# Altium PCB RocketFPGA.PcbDoc
Units mil, origin at the board's own origin, x right, y up, seen from the top; angles counter-clockwise.
Board outline 1000 x 1875 mil, 2 copper layers (Top Layer, Bottom Layer), stack 65.792 mil thick; 57 components, 73 nets, 273 pads, 110 vias.
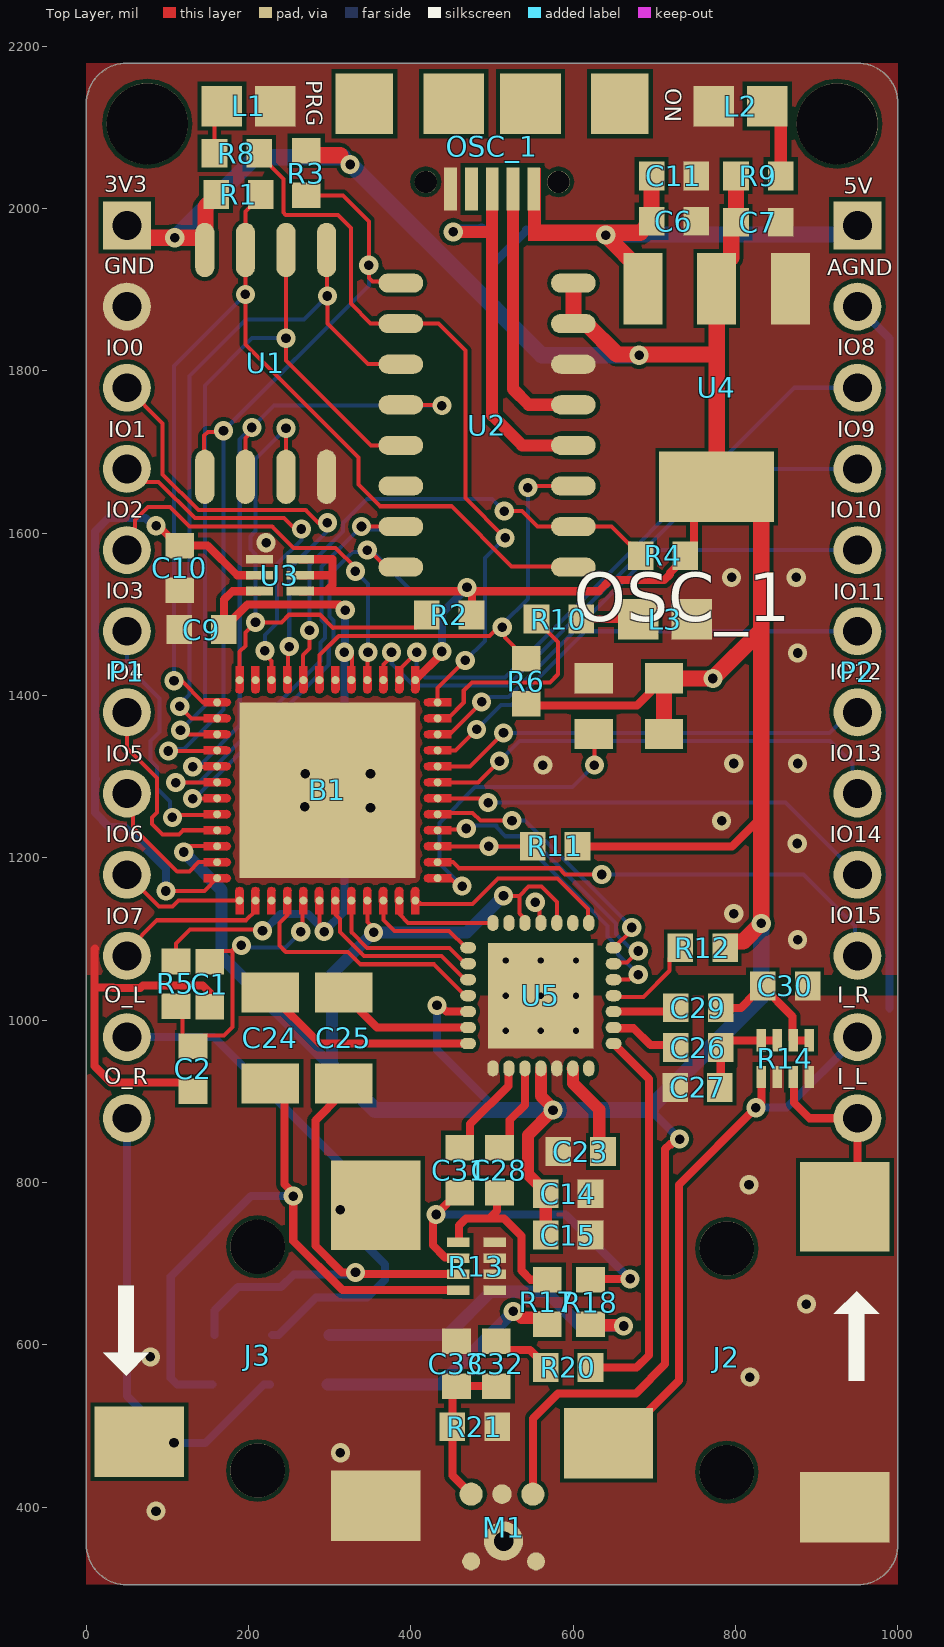
[diagram p0: Top Layer view]
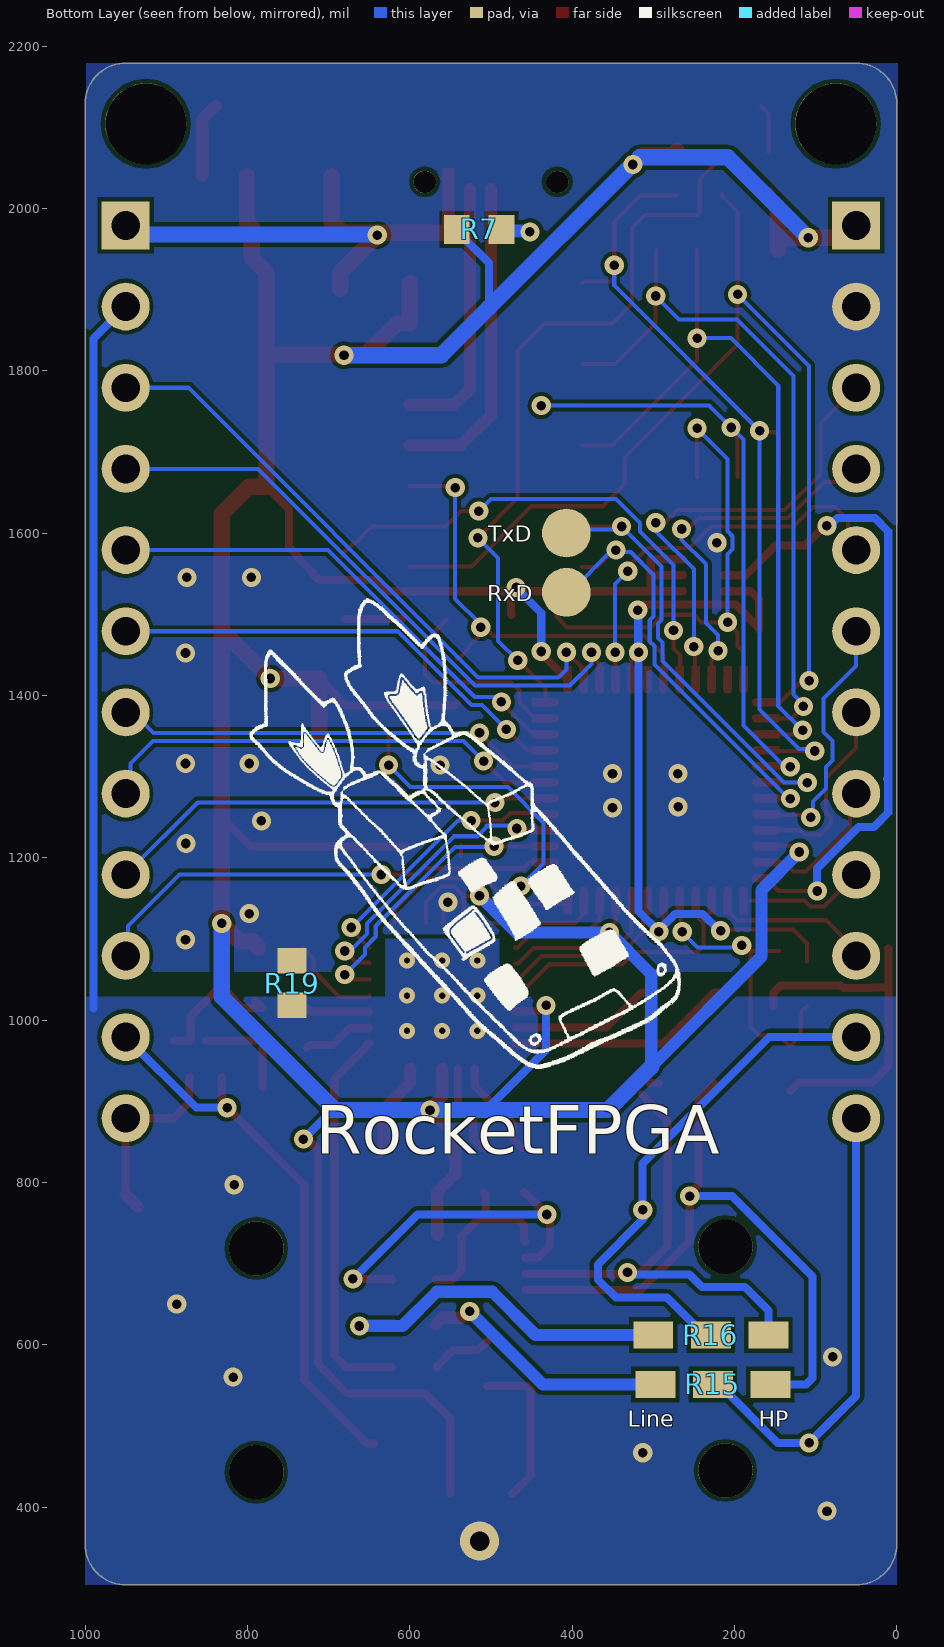
[diagram p1: Bottom Layer view, seen from below]
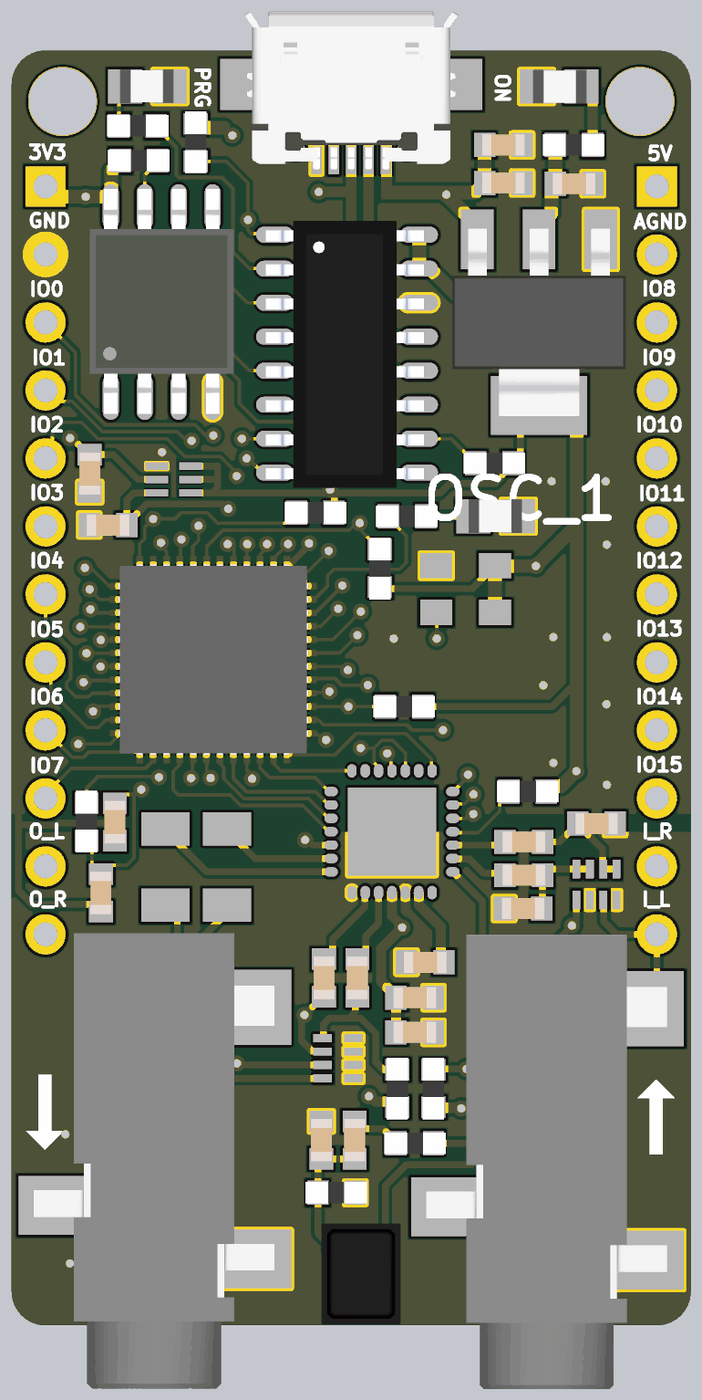
[diagram p2: 3D render of the assembled board from above, using the file's embedded part models]

## Layer stack, top to bottom
Top Solder: solder mask 0.4, Solder Resist, Dk 3.5
Top Layer: signal copper 1.4
Dielectric 1: dielectric 62.9921, FR-4, Dk 4.8
Bottom Layer: signal copper 1.4
Bottom Solder: solder mask 0.4, Solder Resist, Dk 3.5

## Board outline
50,304 cw(c50,354) 0,354 0,2129 cw(c50,2129) 50,2179 950,2179 cw(c950,2129) 1000,2129 1000,354 cw(c950,354) 950,304

## Design rules (kind name [scope] priority, off if disabled: settings)
Clearance [All] p1: gap=5 ignorepadtopadclearanceinfootprint=FALSE except(0: Arc-Hole Track-Hole SMDPad-Hole THPad-Hole Via-Hole Fill-Hole Poly-Hole Region-Hole Text-Hole; 3: SMDPad-SMDPad)
DiffPairsRouting [All] p1: maxlimit=10 minlimit=10 mostfreqgap=10 toplayer_minwidth=15 toplayer_maxwidth=15 toplayer_prefwidth=15 bottomlayer_minwidth=15 bottomlayer_maxwidth=15 bottomlayer_prefwidth=15 maxuncoupledlength=500
MinimumSolderMaskSliver [All] p1: minsoldermaskwidth=0
PolygonConnect [All] p1: connectstyle=Direct reliefconductorwidth=10 reliefentries=4 polygonreliefangle="90 Angle" airgapwidth=10
RoutingVias [All] p1: holewidth=11.81 width=23.62 viastyle="Through Hole" minholewidth=11.81 minwidth=23.62 maxholewidth=50 maxwidth=50
SilkToSolderMaskClearance [IsPad] p1: minsilkscreentomaskgap=0 clearancetoexposedcopper=TRUE
SolderMaskExpansion [All] p1: expansion=4
Width [All] p1: maxlimit=40 minlimit=5 preferedwidth=10 minimp=50.000000 maximp=50.000000 favimp=50.000000
27 further rules are at their usual default settings.

## Classes and differential pairs
component class 04_AudioCodec: C14 C15 C23 C24 C25 C26 C27 C28 C29 C30 C31 C32 C33 J2 J3 M1 R11 R12 R13 R14 R15 R16 R17 R18 R19 R20 R21 U5
component class 02_USB_MCU: C6 C7 OSC_1 R6 R7 U2
component class 01_FPGA_FlashMem: B1 C1 C2 OSC_1 R1 R2 R3 R4 R5 U1
component class 03_Power_IO: C9 C10 C11 L1 L2 L3 P1 P2 R8 R9 R10 U3 U4
differential pair USB_D: +USB_D_P -USB_D_N

## Components (designator, comment, footprint, x,y, rotation, side; value= is the part's Value field where it differs from the comment)
B1 "ICE40UP5K-SG48ITR" QFN50P700X700X100-49N-D 297,1283 r270 top locked
C1 "Ceramic capacitor" "0603 CAP" 152,1044 r90 top value=100nF
C2 "Ceramic capacitor" "0603 CAP" 131.51,940 r90 top value=1uF
C6 "Ceramic capacitor" "0603 CAP" 724,1984 r0 top value=100nF
C7 "Ceramic capacitor" "0603 CAP" 828,1983 r0 top value=100nF
C9 "Ceramic capacitor" "0603 CAP" 142,1481 r180 top value=1uF
C10 "Ceramic capacitor" "0603 CAP" 115,1557 r270 top value=100nF
C11 "Ceramic capacitor" "0603 CAP" 724,2040 r0 top value=1uF
C14 "Ceramic capacitor" "0603 CAP" 593.59,786 r0 top value=100nF
C15 "Ceramic capacitor" "0603 CAP" 593.59,735 r0 top value=1uF
C23 "Ceramic capacitor" "0603 CAP" 609,838 r180 top value=1uF
C24 "Capacitor Electrolitic" CAPCP3216X16N 226.54,978 r270 top
C25 "Capacitor Electrolitic" CAPCP3216X16N 317,978 r270 top
C26 "Ceramic capacitor" "0603 CAP" 754,966 r180 top value=1uF
C27 "Ceramic capacitor" "0603 CAP" 753,917 r180 top value=220pF
C28 "Ceramic capacitor" "0603 CAP" 509,815 r270 top value=1uF
C29 "Ceramic capacitor" "0603 CAP" 754,1015 r0 top value=1uF
C30 "Ceramic capacitor" "0603 CAP" 861,1042 r0 top value=220pF
C31 "Ceramic capacitor" "0603 CAP" 460,815 r270 top value=1uF
C32 "Ceramic capacitor" "0603 CAP" 505,576.44 r270 top value=1uF
C33 "Ceramic capacitor" "0603 CAP" 456,576.44 r90 top value=1uF
J2 "SJ-3523-SMT-TR" CUI_SJ-3523-SMT-TR 789,443 r90 top locked
J3 "SJ-3523-SMT-TR" CUI_SJ-3523-SMT-TR 211,445 r90 top locked
L1 "LED_SMD" 0805 196,2126 r0 top locked
L2 "LED_SMD" 0805 810,2126 r180 top locked
L3 "LED_SMD" 0805 709,1494 r0 top
M1 "SPU0410LR5H-1" SPU0410LR5H-1 474.04,415.83 r0 top
OSC_1 "Canned Oscilator" "canned oscillator small" 711.77,1421.29 r180 top
OSC_1 "Micro USB 2.0 Type B" 629105136821 500,2129 r180 top locked
P1 "Header 12 x 1" HDR1X12 50,1979 r270 top
P2 "Header 12 x 1" HDR1X12 950,1979 r270 top
R1 "Resistor" "RESISTENCIA 0603" 187,2017 r180 top value=10k
R2 "Resistor" "RESISTENCIA 0603" 447.5,1499 r0 top value=10k
R3 "Resistor" "RESISTENCIA 0603" 271,2044 r90 top value=10k
R4 "Resistor" "RESISTENCIA 0603" 711,1572 r0 top value=10k
R5 "Resistor" "RESISTENCIA 0603" 110.39,1045 r90 top value=120
R6 "Resistor" "RESISTENCIA 0603" 542,1416.94 r270 top value=10k
R7 "Resistor" "RESISTENCIA 0603" 514,1974 r180 bottom value=10k
R8 "Resistor" "RESISTENCIA 0603" 186,2068 r0 top value=120
R9 "Resistor" "RESISTENCIA 0603" 827.5,2040 r180 top value=120
R10 "Resistor" "RESISTENCIA 0603" 581.69,1494 r180 top value=120
R11 "Resistor" "RESISTENCIA 0603" 578.06,1214 r0 top value=10k
R12 "Resistor" "RESISTENCIA 0603" 760,1089.06 r0 top value=10k
R13 "Resistor array" RESISTORARRAY_0804 458.03,726.37 r270 top value=47k
R14 "Resistor array" RESISTORARRAY_0804 831.63,929.72 r0 top value=5k6
R15 "Selection resistor" SelectionResistor 191,551 r0 bottom
R16 "Selection resistor" SelectionResistor 193.57,612 r0 bottom
R17 "Resistor" "RESISTENCIA 0603" 568,652 r270 top value=120
R18 "Resistor" "RESISTENCIA 0603" 621,652 r270 top value=120
R19 "Resistor" "Resistencia 0603" 745,1045 r270 bottom value=0R
R20 "Resistor" "RESISTENCIA 0603" 594.09,572 r0 top value=10k
R21 "Resistor" "RESISTENCIA 0603" 478,499 r180 top value=47k
U1 "W25Q32JV" W25Q32J 220,1808 r90 top
U2 "CH551G" CH551 493.77,1733 r0 top
U3 "1V2 and 2V5 dual regulator" "DSE 6" 263.54,1528.32 r180 top
U4 "KIA1117-3.3" SOT-223 776.56,1779 r180 top
U5 "WM8731" WM8731 560,1030 r270 top locked

## Footprints (in the part's own frame and the unit in brackets; to place one, negate y for a bottom-side part, rotate by r counter-clockwise, add the part's x,y. Pads: shape width x height; smd on the part's side, far side on the other; paste and mask are expansions set on the pad)
"0603 CAP" [mm] "Chip Capacitor, Body 1.6x0.8mm, IPC High Density"
  rect 0.8x0.9 smd: 1(-0.7,0) 2(0.7,0)
  body extent -0.8,-0.4 0.8,0.4, height 0.78
0805 [mil]
  rect 50x50 smd: 1(-29,0) 2(37,0)
  body extent -36,-25 42,25, height 17
629105136821 [mm] "Micro USB 2.0 SMT Type B Horizontal 5 Contacts"
  rect 0.4x1.35 smd: 1(-1.3,2.675) 2(-0.65,2.675) 3(0,2.675) 4(0.65,2.675) 5(1.3,2.675)
  round 0.7 hole 0.7 unplated: M1(-2.075,2.45) M2(2.075,2.45)
  rect 1.8x1.9 smd: S1(-4,0) S4(4,0)
  rect 1.9x1.9 smd: S2(-1.2,0) S3(1.2,0)
  body extent -4,-2.73 4,3.17, height 2.77
"canned oscillator small" [mm] "SG-8018CG 49.1520M-TJHSA3"
  rect 1.2x0.95 smd: 1(0,0) 2(2.2,0) 3(2.2,1.75) 4(0,1.75)
CAPCP3216X16N [mm] "Chip Capacitor, 2-Leads, Body 3.20x1.60mm, IPC Medium Density"
  rect 1.25x1.8 smd: 1(-1.425,0) 2(1.425,0)
  body extent -1.7,-0.9 1.7,0.9, height 1.6
CH551 [mm] "MCU"
  oval 1.4x0.6 smd: 1(-2.7,4.445) 2(-2.7,3.175) 3(-2.7,1.905) 4(-2.7,0.635) 5(-2.7,-0.635) 6(-2.7,-1.905) 7(-2.7,-3.175) 8(-2.7,-4.445) 9(2.7,-4.445) 10(2.7,-3.175) 11(2.7,-1.905) 12(2.7,-0.635) 13(2.7,0.635) 14(2.7,1.905) 15(2.7,3.175) 16(2.7,4.445)
  body extent -6.76,-5.02 2.87,7.52, height 1.45
CUI_SJ-3523-SMT-TR [mm] "mini jack"
  rect 2.2x2.8 smd: 1(-1.1,-3.7) 3(0.9,3.7)
  rect 2.8x2.8 smd: 2(8.3,-3.7)
  round 1.7 hole 1.7 unplated: None(0,0) None(7,0)
  body extent -5.93,-4.47 11.07,4.53, height 5
"DSE 6" [mm] "DSE PACKAGE"
  rect 0.85x0.28 smd mask+0.05: 1(0,0) 2(0,-0.5) 3(0,-1) 4(1.27,-1) 5(1.27,-0.5) 6(1.27,0)
  body extent -0.53,-1.24 1.85,0.25, height 0.8
HDR1X12 [mm] "Connector; Header; 12 Position"
  rect 1.5x1.5 hole 0.9: 1(0,0)
  round 1.5 hole 0.9: 2(2.54,0) 3(5.08,0) 4(7.62,0) 5(10.16,0) 6(12.7,0) 7(15.24,0) 8(17.78,0) 9(20.32,0) 10(22.86,0) 11(25.4,0) 12(27.94,0)
QFN50P700X700X100-49N-D [mm]
  round 0.25 smd: 1(-3.45,2.75) 2(-3.45,2.25) 3(-3.45,1.75) 4(-3.45,1.25) 5(-3.45,0.75) 6(-3.45,0.25) 7(-3.45,-0.25) 8(-3.45,-0.75) 9(-3.45,-1.25) 10(-3.45,-1.75) 11(-3.45,-2.25) 12(-3.45,-2.75) 13(-2.75,-3.45) 14(-2.25,-3.45) 15(-1.75,-3.45) 16(-1.25,-3.45) 17(-0.75,-3.45) 18(-0.25,-3.45) 19(0.25,-3.45) 20(0.75,-3.45) 21(1.25,-3.45) 22(1.75,-3.45) 23(2.25,-3.45) 24(2.75,-3.45) 25(3.45,-2.75) 26(3.45,-2.25) 27(3.45,-1.75) 28(3.45,-1.25) 29(3.45,-0.75) 30(3.45,-0.25) 31(3.45,0.25) 32(3.45,0.75) 33(3.45,1.25) 34(3.45,1.75) 35(3.45,2.25) 36(3.45,2.75) 37(2.75,3.45) 38(2.25,3.45) 39(1.75,3.45) 40(1.25,3.45) 41(0.75,3.45) 42(0.25,3.45) 43(-0.25,3.45) 44(-0.75,3.45) 45(-1.25,3.45) 46(-1.75,3.45) 47(-2.25,3.45) 48(-2.75,3.45)
  rrect0% 5.5x5.5 smd: 49(0,0)
  Top Layer region: 3.875,-0.383 3.15,-0.393 3.054,-0.354 3.015,-0.258 3.054,-0.162 3.152,-0.122 3.875,-0.132
  Top Layer region: -2.625,3.875 -2.615,3.15 -2.654,3.054 -2.75,3.015 -2.846,3.054 -2.885,3.15 -2.875,3.15 -2.875,3.875 -2.625,3.875
  Top Layer region: -2.125,3.875 -2.115,3.15 -2.154,3.054 -2.25,3.015 -2.346,3.054 -2.385,3.15 -2.375,3.15 -2.375,3.875 -2.125,3.875
  Top Layer region: -1.625,3.875 -1.615,3.15 -1.654,3.054 -1.75,3.015 -1.846,3.054 -1.885,3.15 -1.875,3.15 -1.875,3.875 -1.625,3.875
  Top Layer region: -1.125,3.875 -1.115,3.15 -1.154,3.054 -1.25,3.015 -1.346,3.054 -1.385,3.15 -1.375,3.15 -1.375,3.875 -1.125,3.875
  Top Layer region: -0.625,3.875 -0.615,3.15 -0.654,3.054 -0.75,3.015 -0.846,3.054 -0.885,3.15 -0.875,3.15 -0.875,3.875 -0.625,3.875
  Top Layer region: -0.125,3.875 -0.115,3.15 -0.154,3.054 -0.25,3.015 -0.346,3.054 -0.385,3.15 -0.375,3.15 -0.375,3.875 -0.125,3.875
  Top Layer region: 0.375,3.875 0.385,3.15 0.346,3.054 0.25,3.015 0.154,3.054 0.115,3.15 0.125,3.15 0.125,3.875 0.375,3.875
  Top Layer region: 0.875,3.875 0.885,3.15 0.846,3.054 0.75,3.015 0.654,3.054 0.615,3.15 0.625,3.15 0.625,3.875 0.875,3.875
  Top Layer region: 1.375,3.875 1.385,3.15 1.346,3.054 1.25,3.015 1.154,3.054 1.115,3.15 1.125,3.15 1.125,3.875 1.375,3.875
  Top Layer region: 1.875,3.875 1.885,3.15 1.846,3.054 1.75,3.015 1.654,3.054 1.615,3.15 1.625,3.15 1.625,3.875 1.875,3.875
  Top Layer region: 2.375,3.875 2.385,3.15 2.346,3.054 2.25,3.015 2.154,3.054 2.115,3.15 2.125,3.15 2.125,3.875 2.375,3.875
  Top Layer region: 2.875,3.875 2.885,3.15 2.846,3.054 2.75,3.015 2.654,3.054 2.615,3.15 2.625,3.15 2.625,3.875 2.875,3.875
  Top Layer region: 3.875,2.625 3.15,2.615 3.054,2.654 3.015,2.75 3.054,2.846 3.15,2.885 3.15,2.875 3.875,2.875 3.875,2.625
  Top Layer region: 3.875,2.125 3.15,2.115 3.054,2.154 3.015,2.25 3.054,2.346 3.15,2.385 3.15,2.375 3.875,2.375 3.875,2.125
  Top Layer region: 3.875,1.625 3.15,1.615 3.054,1.654 3.015,1.75 3.054,1.846 3.15,1.885 3.15,1.875 3.875,1.875 3.875,1.625
  Top Layer region: 3.875,1.125 3.15,1.115 3.054,1.154 3.015,1.25 3.054,1.346 3.15,1.385 3.15,1.375 3.875,1.375 3.875,1.125
  Top Layer region: 3.875,0.625 3.15,0.615 3.054,0.654 3.015,0.75 3.054,0.846 3.15,0.885 3.15,0.875 3.875,0.875 3.875,0.625
  Top Layer region: 3.875,0.125 3.15,0.115 3.054,0.154 3.015,0.25 3.054,0.346 3.15,0.385 3.15,0.375 3.875,0.375 3.875,0.125
  Top Layer region: 3.875,-0.875 3.15,-0.885 3.054,-0.846 3.015,-0.75 3.054,-0.654 3.15,-0.615 3.15,-0.625 3.875,-0.625 3.875,-0.875
  Top Layer region: 3.875,-1.375 3.15,-1.385 3.054,-1.346 3.015,-1.25 3.054,-1.154 3.15,-1.115 3.15,-1.125 3.875,-1.125 3.875,-1.375
  Top Layer region: 3.875,-1.875 3.15,-1.885 3.054,-1.846 3.015,-1.75 3.054,-1.654 3.15,-1.615 3.15,-1.625 3.875,-1.625 3.875,-1.875
  Top Layer region: 3.875,-2.375 3.15,-2.385 3.054,-2.346 3.015,-2.25 3.054,-2.154 3.15,-2.115 3.15,-2.125 3.875,-2.125 3.875,-2.375
  Top Layer region: 3.875,-2.875 3.15,-2.885 3.054,-2.846 3.015,-2.75 3.054,-2.654 3.15,-2.615 3.15,-2.625 3.875,-2.625 3.875,-2.875
  Top Layer region: 2.625,-3.875 2.615,-3.15 2.654,-3.054 2.75,-3.015 2.846,-3.054 2.885,-3.15 2.875,-3.15 2.875,-3.875 2.625,-3.875
  Top Layer region: 2.125,-3.875 2.115,-3.15 2.154,-3.054 2.25,-3.015 2.346,-3.054 2.385,-3.15 2.375,-3.15 2.375,-3.875 2.125,-3.875
  Top Layer region: 1.625,-3.875 1.615,-3.15 1.654,-3.054 1.75,-3.015 1.846,-3.054 1.885,-3.15 1.875,-3.15 1.875,-3.875 1.625,-3.875
  Top Layer region: 1.125,-3.875 1.115,-3.15 1.154,-3.054 1.25,-3.015 1.346,-3.054 1.385,-3.15 1.375,-3.15 1.375,-3.875 1.125,-3.875
  Top Layer region: 0.625,-3.875 0.615,-3.15 0.654,-3.054 0.75,-3.015 0.846,-3.054 0.885,-3.15 0.875,-3.15 0.875,-3.875 0.625,-3.875
  Top Layer region: 0.125,-3.875 0.115,-3.15 0.154,-3.054 0.25,-3.015 0.346,-3.054 0.385,-3.15 0.375,-3.15 0.375,-3.875 0.125,-3.875
  Top Layer region: -0.375,-3.875 -0.385,-3.15 -0.346,-3.054 -0.25,-3.015 -0.154,-3.054 -0.115,-3.15 -0.125,-3.15 -0.125,-3.875 -0.375,-3.875
  Top Layer region: -0.875,-3.875 -0.885,-3.15 -0.846,-3.054 -0.75,-3.015 -0.654,-3.054 -0.615,-3.15 -0.625,-3.15 -0.625,-3.875 -0.875,-3.875
  Top Layer region: -1.375,-3.875 -1.385,-3.15 -1.346,-3.054 -1.25,-3.015 -1.154,-3.054 -1.115,-3.15 -1.125,-3.15 -1.125,-3.875 -1.375,-3.875
  Top Layer region: -1.875,-3.875 -1.885,-3.15 -1.846,-3.054 -1.75,-3.015 -1.654,-3.054 -1.615,-3.15 -1.625,-3.15 -1.625,-3.875 -1.875,-3.875
  Top Layer region: -2.375,-3.875 -2.385,-3.15 -2.346,-3.054 -2.25,-3.015 -2.154,-3.054 -2.115,-3.15 -2.125,-3.15 -2.125,-3.875 -2.375,-3.875
  Top Layer region: -2.875,-3.875 -2.885,-3.15 -2.846,-3.054 -2.75,-3.015 -2.654,-3.054 -2.615,-3.15 -2.625,-3.15 -2.625,-3.875 -2.875,-3.875
  Top Layer region: -3.875,-2.625 -3.15,-2.615 -3.054,-2.654 -3.015,-2.75 -3.054,-2.846 -3.15,-2.885 -3.15,-2.875 -3.875,-2.875 -3.875,-2.625
  Top Layer region: -3.875,-2.125 -3.15,-2.115 -3.054,-2.154 -3.015,-2.25 -3.054,-2.346 -3.15,-2.385 -3.15,-2.375 -3.875,-2.375 -3.875,-2.125
  Top Layer region: -3.875,-1.625 -3.15,-1.615 -3.054,-1.654 -3.015,-1.75 -3.054,-1.846 -3.15,-1.885 -3.15,-1.875 -3.875,-1.875 -3.875,-1.625
  Top Layer region: -3.875,-1.125 -3.15,-1.115 -3.054,-1.154 -3.015,-1.25 -3.054,-1.346 -3.15,-1.385 -3.15,-1.375 -3.875,-1.375 -3.875,-1.125
  Top Layer region: -3.875,-0.625 -3.15,-0.615 -3.054,-0.654 -3.015,-0.75 -3.054,-0.846 -3.15,-0.885 -3.15,-0.875 -3.875,-0.875 -3.875,-0.625
  Top Layer region: -3.875,-0.125 -3.15,-0.115 -3.054,-0.154 -3.015,-0.25 -3.054,-0.346 -3.15,-0.385 -3.15,-0.375 -3.875,-0.375 -3.875,-0.125
  Top Layer region: -3.875,0.375 -3.15,0.385 -3.054,0.346 -3.015,0.25 -3.054,0.154 -3.15,0.115 -3.15,0.125 -3.875,0.125 -3.875,0.375
  Top Layer region: -3.875,0.875 -3.15,0.885 -3.054,0.846 -3.015,0.75 -3.054,0.654 -3.15,0.615 -3.15,0.625 -3.875,0.625 -3.875,0.875
  Top Layer region: -3.875,1.375 -3.15,1.385 -3.054,1.346 -3.015,1.25 -3.054,1.154 -3.15,1.115 -3.15,1.125 -3.875,1.125 -3.875,1.375
  Top Layer region: -3.875,1.875 -3.15,1.885 -3.054,1.846 -3.015,1.75 -3.054,1.654 -3.15,1.615 -3.15,1.625 -3.875,1.625 -3.875,1.875
  Top Layer region: -3.875,2.375 -3.15,2.385 -3.054,2.346 -3.015,2.25 -3.054,2.154 -3.15,2.115 -3.15,2.125 -3.875,2.125 -3.875,2.375
  Top Layer region: -3.875,2.875 -3.15,2.885 -3.054,2.846 -3.015,2.75 -3.054,2.654 -3.15,2.615 -3.15,2.625 -3.875,2.625 -3.875,2.875
  body extent -3.55,-3.55 3.55,3.55, height 1
"RESISTENCIA 0603" [mm] "Chip Resistor, 2-Leads, Body 2,30x0,80mm, IPC Medium Density"
  rect 0.8x0.9 smd: 1(-0.713,0) 2(0.687,0)
  body extent -1.15,-0.4 1.15,0.4, height 0.6
"Resistencia 0603" [mm] "Chip Resistor, 2-Leads, Body 2,30x0,80mm, IPC Medium Density"
  rect 0.8x0.9 smd: 1(-0.713,0) 2(0.687,0)
  body extent -1.15,-0.4 1.15,0.4, height 0.6
RESISTORARRAY_0804 [mm] "ResistorArray_0804"
  rect 0.3x0.7 smd: 1(0,0) 2(0.5,0) 3(1,0) 4(1.5,0) 5(1.5,1.15) 6(1,1.15) 7(0.5,1.15) 8(0,1.15)
  body extent -0.3,0.06 1.8,1.16, height 0.45
SelectionResistor [mm] "3 pin selection resistor 0603"
  rect 1.25x0.85 smd: 1(-0.9,0) 2(0.9,0) 3(2.703,0)
SOT-223 [mil]
  rect 48x88 smd: 1(-91,-122) 2(0,-122) 3(91,-122)
  rect 141.73x86.61 smd: 4(0,122.01)
  body extent -128,-138 128,138, height 65
SPU0410LR5H-1 [mm] "mems microphone"
  round 0.723 smd: 1(0,0) 4(1.932,0)
  round 0.562 smd: 2(0,-2.103) 3(2.031,-2.103)
  round 0.612 smd: 5(0.966,0)
  round 1.224 hole 0.61 paste-909.217 mask+0.102: 6(1.015,-1.469)
  body extent -0.45,-2.8 2.5,0.96, height 1.13
W25Q32J [mm]
  oval 1.7x0.6 smd: 1(-3.525,1.88) 2(-3.525,0.61) 3(-3.525,-0.66) 4(-3.525,-1.93) 5(3.575,-1.93) 6(3.575,-0.66) 7(3.575,0.61) 8(3.575,1.88)
  body extent -4.15,-2.72 4.25,2.66, height 2.29
WM8731 [mm] "PQFN, 28-Leads, Body 5.00x5.00mm, Pitch 0.50mm, Thermal Pad 3.30x3.30mm, IPC Medium Density"
  oval 0.5x0.35 smd: 1(-2.275,1.5) 2(-2.275,1) 3(-2.275,0.5) 4(-2.275,0) 5(-2.275,-0.5) 6(-2.275,-1) 7(-2.275,-1.5) 15(2.275,-1.5) 16(2.275,-1) 17(2.275,-0.5) 18(2.275,0) 19(2.275,0.5) 20(2.275,1) 21(2.275,1.5)
  oval 0.35x0.5 smd: 8(-1.5,-2.275) 9(-1,-2.275) 10(-0.5,-2.275) 11(0,-2.275) 12(0.5,-2.275) 13(1,-2.275) 14(1.5,-2.275) 22(1.5,2.275) 23(1,2.275) 24(0.5,2.275) 25(0,2.275) 26(-0.5,2.275) 27(-1,2.275) 28(-1.5,2.275)
  rect 3.3x3.3 smd: 19(0,0)
  body extent -2.5,-2.5 2.5,2.5, height 1

## Part data
B1: "FPGA - Field Programmable Gate Array iCE40-UltraPlus, 5280 LUTs, 1.2V", Link=https://www.mouser.es/ProductDetail/Lattice/ICE40UP5K-SG48I?qs=Rp3RbKSfAt3UqOG1AN4%2FAg%3D%3D, vendor=Mouser
C1 C2 C6 C7 C9 C10 C11 C14 C15 C23 C26 C27 C28 C29 C30 C31 C32: "Capacitor", ManufacturerReference=-, Package=0603, Supplier Part Number 1=80-C1206C104K5R, Supplier 1=Mouser, vendor=LCSC
  C1 C6 C7 C10 C14: price=0.0023, vendorID=0603F104M500NT
  C2 C9 C11 C15 C23 C26 C28 C29 C31 C32: price=0.0053, vendorID=CC0603ZRY5V7BB105
  C27 C30: price=0.0035, vendorID=0603B221K500NT
C33: "Capacitor", ManufacturerReference=-, Package=220pF, Supplier Part Number 1=80-C1206C104K5R, price=0.0053, Supplier 1=Mouser, vendor=LCSC, vendorID=CC0603ZRY5V7BB105
J2: "Jack connector", Link=https://www.mouser.es/ProductDetail/CUI-Devices/SJ-3523-SMT-TR?qs=WyjlAZoYn51zOHzJ3r4ZRA%3D%3D, Link 2=https://lcsc.com/product-detail/Audio-Video-Connectors_BOOMELE-Boom-Precision-Elec-PJ-320B_C18594.html, vendor=Mouser, Vendor 2=LCSC
J3: Package=-, ManufacturerReference=SJ-3523-SMT-TR, price=0.777, vendor=Mouser, vendorID=490-SJ-3523-SMT-TR
L1 L2 L3: "LED SMD", Supplier Part Number 1=630-HSMC-C170, price=0.087, Supplier 1=Mouser, vendor=Mouser, vendorID=743-IN-S85AT5B
M1: "MEMS Microphone", Link=https://www.mouser.es/ProductDetail/Knowles/SPU0410LR5H-QB?qs=%2Fha2pyFadujsOyq9m86PskfJJTo%2F6w8gLVlLZDQM1tgnAEafFx2amg%3D%3D, vendor=Mouser
OSC_1: "Canned Oscilator -LFSPXO019116BULK", Link=https://lcsc.com/product-detail/SMD-Oscillators-XO_Shenzhen-SCTF-Elec-S3D49-152000B20F30T_C387443.html, vendor=LCSC
OSC_1: library part 629105136821, "Micro USB 2.0 Type B Horizontal SMT 5 Contacts WR-COM", ComponentLink1Description=Manufacturer, ComponentLink1URL=http://www.we-online.de, ComponentLink2Description=Datasheet, ComponentLink2URL=http://katalog.we-online.de/em/datasheet/629105136821.pdf, Link=https://lcsc.com/product-detail/USB-Connectors_Jing-Extension-of-the-Electronic-Co-Jing-Extension-of-the-Electronic-Co-micro-5PAll-posts-are-not-guided-Flat-welding-High-temperature_C77238.html, Link 2=https://www.mouser.es/ProductDetail/Wurth-Elektronik/629105136821?qs=%2Fha2pyFaduiBjBt32de63eUvWSiL1Vrl53OTMO%252B7qnQKl4r3Xe3wDQ%3D%3D, vendor=LCSC, Vendor 2=Mouser
P1 P2: library part "Header 12_1", "Header, 11-Pin", Link=https://lcsc.com/product-detail/Pin-Header-Female-Header_CJT-Changjiang-Connectors-A2541WV-12P_C225487.html, vendor=LCSC
R1 R2 R3 R4 R5 R6 R7 R11 R12 R17 R18 R19 R20 R21: ManufacturerReference=-, Package=0603, Supplier Part Number 1=2358436, Supplier 1=Farnell, vendor=LCSC
  R1 R2 R3 R4 R6 R7 R11 R12 R20: price=0.0009, vendorID=0603WAF1002T5E
  R5: price=0.0024, vendor2=vendor, vendorID=CR0603FA1200G
  R17 R18: price=0.0024, vendorID=CR0603FA1200G
  R19 R21: price=0.0007, vendorID=RS-03K473JT
R8 R9 R10: Supplier Part Number 1=2358436, price=0.0024, Supplier 1=Farnell, vendor=LCSC, vendor2=vendor, vendorID=CR0603FA1200G
R13: "4 resistors in smd array configuration", ManufacturerReference=TC164-FR-0747KL, Package=-, price=0.201, vendor=Mouser, vendorID=603-TC164-FR-0747KL
R14: "4 resistors in smd array configuration", ManufacturerReference=TC164-FR-075K6L, Package=-, price=0.201, vendor=Mouser, vendorID=603-TC164-FR-075K6L
U1: "32M-BIT SERIAL FLASH MEMORY WITH DUAL AND QUAD SPI", Link=https://lcsc.com/product-detail/FLASH_Winbond-Elec-W25Q32JVSSIQ_C82344.html, vendor=LCSC
U2: "Microcontroller wUSB support", ComponentLink1Description=LCSC, ComponentLink1URL=https://lcsc.com/product-detail/USB_CH551G_C108958.html, Link=https://lcsc.com/product-detail/WCH_WCH-Jiangsu-Qin-Heng-CH551G_C108958.html, vendor=LCSC
U3: library part TLV7111225DSER, Link=https://lcsc.com/product-detail/Low-Dropout-Regulators-LDO_Texas-Instruments-TLV7111225DSER_C201579.html, vendor=LCSC
U4: "5V to 3.3V 800mA Low-Dropout Linear Regulator", Link=https://lcsc.com/product-detail/Low-Dropout-Regulators-LDO_PUOLOP-AMS1117-3-3_C351784.html, vendor=LCSC
U5: "Portable Internet Audio CODEC with Headphone Driver  and Programmable Sample Rates", Link=https://www.mouser.es/ProductDetail/Cirrus-Logic/WM8731CSEFL?qs=3kEcuH7qFhd2WZOaNm6tsA%3D%3D, vendor=Mouser
C24 C25: Author="Jaime Jiménez Ortega", Date=21/05/2009, Link=https://lcsc.com/product-detail/Others_TANCAP-Tech-CA45-227M004BT_C327726.html, vendor=LCSC

## Free pads (board coordinates)
  round 100 hole 100: 3(75,2104) 3(925,2104)
  round 60 smd far side: 4(407,1527) 4(407,1600)

## Via types
v1: diameter 23.62, hole 11.81, Top Layer to Bottom Layer, tented both sides, 101 vias
v2: diameter 19.68, hole 7.87, Top Layer to Bottom Layer, tented both sides, 9 vias

## Nets (pads, with @x,y where several pads share a name; then routed paths per layer and width w, separated by ;. In a path a pad name is that pad's centre, name@x,y a point inside that pad or via, vN(x,y) a via of type N, cw(c..) or ccw(c..) an arc to the next point about the centre after c; other vN are vias at no path point)
1V2: B1.5 B1.30 C9.1 R5.2 U3.6 | length 971.4
  Top Layer w5: R5.2 110.39,1094.18 127.52,1111.31 215.69,1111.31 v1(217,1110) ; B1.30 287.08,1147.09 287.08,1111.93 290.01,1109 v1(293,1109) ; v1(318,1453) 323.87,1453 327.44,1449.44 327.44,1436.47 326.53,1435.56 B1.5
  Top Layer w10: C9.1 C9.1@169.56,1482.97 ; U3.6 179.87,1528.32 169.56,1518 C9.1@169.56,1482.97 ; v1(319,1505) 312.19,1511.81 198.4,1511.81 C9.1@169.56,1482.97
  Bottom Layer w10: v1(217,1110) 218.58,1110 239.12,1130.55 273.3,1130.55 293,1110.85 v1(293,1109) 318,1134 v1(318,1453) 318.5,1453.5 318.5,1504.5 v1(319,1505)
2V5: B1.24 C10.1 U3.5 | length 800.5
  Top Layer w5: v1(86,1609) v1@88.59,1609 ; v1(98,1158.92) 145.36,1158.92 B1.24 ; C10.1@113.03,1584.56 C10.1
  Top Layer w10: v1@88.59,1609 C10.1@113.03,1584.56 ; C10.1 149.44,1584.56 186,1548 U3.5
  Bottom Layer w10: v1(86,1609) 82.31,1609 72.79,1618.53 27,1618.53 10.47,1602 10.47,1298.43 12,1296.9 10.47,1295.37 10.47,1255.53 28,1238 46.9,1238 98,1186.9 v1(98,1158.92)
3V3: B1.1 B1.22 B1.33 C7.1 C14.1 C15.1 M1.4 OSC_1.1@711.77,1421.29 OSC_1.4@711.77,1352.39 P1.1 R1.2 R2.2 R3.2 R4.2 R6.2 R7.1 R9.2 R11.2 R12.2 U1.8 U2.15 U2.16 U3.1 U3.2 U3.3 U4.2 U4.4 U5.3 U5.5 U5.12 U5.18 | length 6526.8
  Top Layer w5: v1(120,1207) 127.55,1214.55 160.72,1214.55 B1.22 ; B1.33 346.21,1120.83 354,1113.04 v1(354,1108) ; v1(514,1153) 533.69,1153 ; U5.5 540.31,1124.9 533.69,1131.52 533.69,1153 ; U5.3 579.68,1145.62 561,1164.31 545,1164.31 533.69,1153
  Top Layer w10: U3.1 295.27,1528.32 ; U3.2 302.08,1548 303.08,1549 ; U3.3 302.76,1567.69 303.08,1568 303.08,1549 ; B1.1 438,1451.56 v1(438,1454) ; v1(432,1018) 435.69,1018 443.37,1010.31 U5.12 ; v1@469,1528.32 295.27,1528.32 ; R2.2 475,1499.45 475,1528.32 631.32,1528.32 645,1542 712,1542 719.07,1549.07 719.07,1551.05 738.06,1570.03 R4.2 748.81,1582.75 748.81,1629.24 U4.4 ; R6.2 544.38,1387.5 678.41,1387.5 OSC_1.1@711.61,1420.71 ; M1.4 550.1,509.1 581,540 677,540 713.04,576.04 713.04,840.96 719.07,847 721.01,847 727.31,853.31 v1(731,853.31) ; R11.2 795.63,1214 831.63,1250 ; 295.27,1528.32 303.08,1536.12 303.08,1549
  Top Layer w15: U5.18 560,906.33 575,891.33 v1(575,889) 544,858 544,810 566.03,787.97 C14.1 C15.1
  Top Layer w20: P1.1 65.12,1963.88 v1(109,1963.88) 144.33,1963.88 146,1962.21 U1.8 146.69,1949.46 146.69,2001.78 159.94,2015.03 R1.2 ; R3.2 276.75,2065.31 312.71,2065.31 ; U2.16 U2.15 615.81,1858 653.81,1820 681,1820 776.56,1820 ; OSC_1.4@711.61,1353.78 711.61,1420.71 v1(771.9,1420.71) 831.63,1480.44 ; R12.2 787.06,1091.02 792.81,1096.77 809.4,1096.77 v1(831.63,1119) 831.63,1250 831.63,1480.44 ; R9.2 C7.1 794.69,1977.25 794.69,1939.13 776.56,1921 U4.2 776.56,1820 ; 776.56,1820 U4.4 798.32,1656.99 831.63,1623.69 831.63,1480.44
  Bottom Layer w10: v1(432,1018) 432,963 506,889 ; v1(438,1454) 438,1501.43 469,1532.43 v1(469,1533) ; 502.5,1877.5 502.5,1932.47 542.06,1972.03 R7.1 ; 695.31,889 v1(731,853.31)
  Bottom Layer w15: v1(120,1207) 166.69,1160.31 166.69,1078.31 302.5,942.5 302.5,1056.5 v1(354,1108) 469,1108 v1(514,1153)
  Bottom Layer w20: v1(109,1963.88) 208.12,2063 317,2063 ; 302.5,942.5 356,889 506,889 v1(575,889) 695.31,889 ; v1@325.5,2054.5 502.5,1877.5 561,1819 v1(681,1819) ; 693.65,890.65 831.63,1028.63 v1(831.63,1119)
  other v1: 325,2054
5V: C6.1 C11.1 OSC_1.1@551.18,2023.69 P2.1 U4.3 | length 600.7
  Top Layer w20: 555,1970 v1@636.56,1970 ; v1@639.78,1966.78 685.56,1921 U4.3 ; v1@640,1970 682.44,1970 688.72,1976.28 690.69,1976.28 696.44,1982.03 C6.1 C11.1
  Bottom Layer w20: v1(640,1967) 640.69,1967.69 938.69,1967.69 P2.1
AGND: C14.2 C15.2 C23.2 C27.2 C30.2 C33.2 J2.1 J3.1 M1.2 M1.3 M1.5 M1.6 P2.2 R13.5 R13.6 R13.7 R13.8 R14.2 R14.4 R19.2 R21.1 U5.15 U5.19 | length 880.8
  Bottom Layer w10: P2.2 989.53,1839.47 989.53,1014.53
  other v1: 85.88,395 313,466.88 817.57,560 79,585 887.1,650 816.43,797
  other v2: 516.69,986.69 560,986.69 603.31,986.69 516.69,1030 560,1030 603.31,1030 516.69,1073.31 560,1073.31 603.31,1073.31
AUDIO_IN_L: J2.2 P2.12 R14.3 | length 233.6
  Top Layer w10: R14.3 871.91,928.82 871.91,898.09 891,879 P2.12 J2.2@950,785.1
  Top Layer w15: J2.2 J2.2@950,785.1
AUDIO_IN_R: J2.3 P2.11 R14.1 | length 697.7
  Top Layer w10: J2.3 652.43,478.43 730,556 730,797 v1(825,892) 831.63,898.63 R14.1
  Bottom Layer w10: v1@823,892 v1(825,892) 863,892 P2.11
AUDIO_OUT_L: J3.2 P1.11 R16.2 | length 662.1
  Bottom Layer w10: P1.11 157,979 313,823 v1(313,766) 311.14,764.14 311.14,755.86 368,699 368,680 346,658 282.87,658 236.87,612 R16.2
AUDIO_OUT_R: J3.3 P1.12 R15.2 | length 572.3
  Bottom Layer w10: P1.12 50,537 v1(108,479) 146.56,479 218.56,551 R15.2
CDC_ADCDAT: B1.31 U5.10 | length 223.6
  Top Layer w5: B1.31 306.84,1129.78 312.31,1124.32 312.31,1108.24 341.86,1078.69 437.81,1078.69 466.82,1049.68 U5.10
CDC_ADCLRC: B1.28 U5.11 | length 317.5
  Top Layer w5: B1.28 247.79,1129.33 238,1119.54 238,1091.69 245.69,1084 322.41,1084 337.72,1068.69 428.13,1068.69 466.82,1030 U5.11
CDC_BCLK: B1.35 U5.7 | length 136.6
  Top Layer w5: B1.35 385.58,1130.44 396.46,1119.57 U5.7
CDC_DACDAT: B1.34 U5.8 | length 142.5
  Top Layer w5: B1.34 365.9,1123.41 379.74,1109.57 446.97,1109.57 467.48,1089.06 U5.8
CDC_DACLRC: B1.32 U5.9 | length 199
  Top Layer w5: B1.32 326.53,1108.16 346,1088.69 447.5,1088.69 466.82,1069.37 U5.9
CDC_MCLK: B1.36 U5.1 | length 254.8
  Top Layer w5: 410.19,1144.71 411.9,1143 476,1143 507.31,1174.31 580.69,1174.31 618.09,1136.91 618.09,1120.53 U5.1
CDONE: B1.7 R6.1 U2.11 | length 560.3
  Top Layer w5: B1.7 287.16,1449.47 311,1473.31 496.7,1473.31 507.39,1484 v1(512.43,1484) 515.99,1480.44 515.99,1471.01 526.78,1460.22 526.78,1458.25 540.03,1445 R6.1 ; v1(544,1656) 546,1658 U2.11
  Bottom Layer w5: v1@513,1488 544,1519 v1(544,1656)
CH_TO_FPGA: B1.48 R8.2 U2.2 | length 923.3
  Top Layer w5: R8.2 213.06,2066.03 242.66,2036.43 242.66,1995 245.66,1992 310,1992 326,1976 326,1882.52 350.17,1858.35 387.11,1858.35 U2.2 434,1858 467,1825 467,1643 v1(516,1594) ; B1.48 432.83,1409.01 v1(466.82,1443)
  Bottom Layer w5: v1(466.82,1443) 491,1467.18 491,1569 v1(516,1594)
CODEC_CLK: B1.41 U5.28 | length 334.5
  Top Layer w5: B1.41 434.67,1255.31 476,1255.31 485.62,1245.69 v1(524.45,1245.69) ; U5.28 650.14,1089.06 672,1110.91 v1(672,1114) v1@673,1115
  Bottom Layer w5: v1(524.45,1245.69) 540.31,1245.69 v1(672,1114)
CODEC_CS: B1.39 R11.1 U5.26 | length 412.8
  Top Layer w5: B1.39 432.88,1214.05 495.95,1214.05 v1(496,1214) 536.04,1214 537,1214.96 R11.1@537,1201.96 ; U5.26 668.65,1049.68 674.96,1056 v1(680,1056)
  Bottom Layer w5: v1(496,1214) 496.62,1213.38 544.34,1213.38 641.86,1115.86 641.86,1102.69 655.21,1089.33 655.21,1080.79 v1(680,1056)
CODEC_DI: B1.40 U5.27 | length 359.3
  Top Layer w5: B1.40 433.75,1234.71 466.71,1234.71 v1(468,1236) ; U5.27 651.25,1071.05 666.05,1071.05 v1(680,1085)
  Bottom Layer w5: v1(468,1236) 471.56,1239.56 505.14,1239.56 505.14,1237.69 516.45,1226.38 545.48,1226.38 652.69,1119.17 652.69,1106 673.69,1085 v1(680,1085)
GND: B1.49 C1.1 C2.1 C6.2 C7.2 C9.2 C10.2 C11.2 L1.2 L2.2 L3.2 OSC_1.2@625.16,1421.29 OSC_1.5 P1.2 R19.1 U1.4 U2.14 U3.4 U4.1 U5.4 | length 472.3
  Top Layer w5: v1(553,1145) 553,1139.96 558.32,1134.64 558.32,1121.25 U5.4
  Top Layer w10: 10.47,1088.01 10,1087.54 10,1040 ; C2.1 120.76,923.19 30.09,923.19 10,943.28 10,1040 ; C1.1 152,1034.1 143.41,1042.69 69.59,1042.69 66.37,1039.47 33.63,1039.47 33.1,1040 10,1040
  other v1: 876.31,1098.99 797.61,1131.14 875.78,1217.49 782.72,1245.35 350.15,1261.59 269.36,1262.83 269.54,1303.63 350.15,1303.63 562.55,1314 797.61,1316.03 876.31,1316.03 876.31,1452.21 795,1545.36 874.55,1545.36 221.53,1588.01
IO0: B1.9 P1.3 | length 566.8
  Top Layer w5: P1.3 94,1735 94,1672.27 138,1628.27 270.32,1628.27 285.95,1612.64 v1(297,1612.64) ; B1.9 248.71,1419.75 248.71,1458.71 v1(250,1460)
  Bottom Layer w5: v1(250,1460) 250,1555.73 297,1602.73 v1(297,1612.64)
IO1: B1.10 P1.4 | length 453.8
  Top Layer w5: P1.4 66,1663 89.13,1663 133.86,1618.27 243.73,1618.27 257,1605 v1(265,1605) ; v1(220,1455) 220,1450.24 228.1,1442.13 B1.10
  Bottom Layer w5: v1(220,1455) v1(220,1455) 220.04,1474.31 235,1489.27 235,1561.55 265,1591.55 v1(265,1605)
IO2: B1.4 P1.5 | length 493.2
  Top Layer w5: P1.5 60.03,1589.03 60.03,1616.03 76,1632 103,1632 127.19,1607.81 226.88,1607.81 ; 229.04,1607.81 255.08,1581.77 306.98,1581.77 331.45,1557.3 v1(331.45,1553) ; B1.4 346.21,1452.21 v1(347,1453)
  Bottom Layer w5: v1(331.45,1553) 347,1537.45 v1(347,1453)
IO3: B1.20 P1.6 | length 322
  Top Layer w5: v1@103,1248 104.71,1249.71 v1(106,1249.71) 108.84,1252.55 160.25,1252.55 B1.20
  Bottom Layer w5: P1.6 50,1436 90,1396 90,1355 79,1344 79,1319.98 87.03,1311.95 87.03,1284.97 102.98,1269.02 102.98,1252.72 v1(106,1249.71)
IO4: B1.21 P1.7 | length 243.6
  Top Layer w5: P1.7 50,1335 87.03,1297.97 87.03,1255.73 81,1249.71 81,1241.39 93.93,1228.46 114,1228.46 119.33,1233.79 160.13,1233.79 160.65,1234.31 B1.21
IO5: B1.23 P1.8 | length 176.9
  Top Layer w5: P1.8 57.57,1271.43 57.57,1237.43 112,1183 127,1183 138.42,1194.42 B1.23 B1.23@160.25,1195.34
IO6: B1.25 P1.9 | length 158.2
  Top Layer w5: P1.9 89.39,1139.61 106,1139.61 113.57,1147.17 B1.25
IO7: B1.26 P1.10 | length 198.1
  Top Layer w5: P1.10 50,1085.88 87.06,1122.94 196.76,1122.94 208.42,1134.6 B1.26
IO8: B1.2 P2.3 | length 763.8
  Top Layer w5: B1.2 385.58,1431.58 v1(407,1453) 408.87,1454.87 v1@408.87,1457
  Bottom Layer w5: v1(407,1453) 407,1432 417,1422 515.62,1422 872.62,1779 P2.3
IO9: B1.3 P2.4 | length 748.2
  Top Layer w5: B1.3 365.9,1437.86 376,1447.96 v1(376,1453)
  Bottom Layer w5: v1(376,1453) 376.31,1452.69 376.31,1438.55 402.86,1412 519.76,1412 786.76,1679 P2.4
IO10: B1.46 P2.5 | length 611.6
  Top Layer w5: B1.46 447.43,1351.9 487,1391.47 v1(487,1392)
  Bottom Layer w5: v1(487,1392) 493,1398 519.9,1398 700.9,1579 P2.5
IO11: B1.45 P2.6 | length 578
  Top Layer w5: B1.45 455.06,1332.21 v1(480.86,1358.01)
  Bottom Layer w5: v1(480.86,1358.01) 510.84,1388 524.04,1388 615.04,1479 P2.6
IO12: B1.44 P2.7 | length 544.7
  Top Layer w5: B1.44 472.75,1312.53 v1(514,1353.78)
  Bottom Layer w5: v1(514,1353.78) 915.73,1353.78 940.95,1379 P2.7
IO13: B1.43 P2.8 | length 583.3
  Top Layer w5: B1.43 482.84,1292.84 v1(509,1319)
  Bottom Layer w5: v1(509,1319) 533.78,1343.78 916.22,1343.78 943.97,1316.03 943.97,1285.03 P2.8
IO14: B1.42 P2.9 | length 556.2
  Top Layer w5: B1.42 484.63,1273.16 489.96,1267.83 v1(495,1267.83)
  Bottom Layer w5: v1(495,1267.83) 861.17,1267.83 P2.9
IO15: B1.38 P2.10 | length 584.9
  Top Layer w5: B1.38 451.68,1194.42 459.09,1187 582.14,1187 589.86,1179.28 v1(635,1179.28)
  Bottom Layer w5: v1(635,1179.28) 883.72,1179.28 946.97,1116.03 946.97,1082.03 P2.10
LED: B1.47 R10.2 | length 277.1
  Top Layer w5: B1.47 445.4,1371.58 465,1391.18 465,1406 475,1416 571,1416 581,1426 581,1465.67 566.95,1479.71 554.64,1492.03 R10.2 R10.2@567.94,1480.7
MEM_CLK: B1.15 U1.6 U2.5 | length 929.6
  Top Layer w5: v1(116,1357) 121.1,1351.9 B1.15 ; U1.6 v1(246,1840) 246,1812.69 350.69,1708 U2.5
  Bottom Layer w5: v1(116,1357) 146,1387 146,1782 204,1840 v1(246,1840)
MEM_CS: B1.16 R3.1 U1.1 U2.1 | length 1050.9
  Top Layer w5: v1(101.07,1331.45) 101.24,1331.29 160.25,1331.29 B1.16 ; U1.1 145,1670.24 145,1720 149.69,1724.69 167.69,1724.69 v1(169,1726) ; R3.1 316.06,2015.94 348,1984 v1(348,1930) 348.1,1929.9 348.1,1914 352.41,1909.69 385.78,1909.69 U2.1
  Bottom Layer w5: v1(101.07,1331.45) 103.7,1334.07 120.38,1334.07 169,1382.69 v1(169,1726) 348,1905 v1(348,1930)
MEM_D0_IO1: B1.17 U1.2 U2.4 | length 874.7
  Top Layer w5: v1(131.19,1311.98) 122.08,1311.98 121.87,1311.76 160.41,1311.76 B1.17 ; U1.2 196,1716.96 204,1724.96 v1(204,1730) ; U2.4 387.97,1757.5 437.5,1757.5 v1(438,1757)
  Bottom Layer w5: v1(131.19,1311.98) 126.95,1311.98 124.52,1314.41 140.41,1314.41 189,1363 189,1715 v1(204,1730) 231,1757 v1(438,1757)
MEM_DI_IO0: B1.14 U1.5 U2.3 | length 877.3
  Top Layer w5: v1(115,1386.35) 129.76,1371.58 B1.14 ; U1.5 296.5,1948.26 296.5,1892.5 v1(297,1892) 297,1858 347,1808 U2.3
  Bottom Layer w5: v1(115,1386.35) 115,1389.03 127.31,1401.35 127.31,1793.31 197,1863 268,1863 v1(297,1892)
MEM_HOLD_IO3: B1.13 R1.1 U1.7 U2.9 | length 1306.5
  Top Layer w5: v1(108,1418) 117,1418 143.73,1391.27 B1.13 ; R1.1 215.06,2015.03 196,1995.97 U1.7 v1(196,1894) 196,1832.53 335.26,1693.26 335.26,1659.74 362,1633 449.69,1633 523.69,1559 599.06,1559 U2.9
  Bottom Layer w5: v1(108,1418) 108,1806 v1(196,1894)
MEM_WP_IO2: B1.12 R2.1 U1.3 | length 628.2
  Top Layer w5: B1.12 188.73,1453.73 196,1461 196,1477.58 v1(208.42,1490) 240.57,1490 249.88,1499.31 287.69,1499.31 303.98,1483.02 304.75,1483.78 406.19,1483.78 419.44,1497.03 R2.1 ; U1.3 v1(246,1729)
  Bottom Layer w5: v1(208.42,1490) 208.42,1573.81 202.22,1580.01 202.22,1596.01 208.42,1602.21 208.42,1691.42 v1(246,1729)
MICIN: R20.2 U5.22 | length 481.1
  Top Layer w10: R20.2 678,572 693,587 693,927.51 653.24,967.27 653.24,969.2 651.5,970.94 U5.22
NetB1_29: B1.29 C1.2 C2.2 R5.1 | length 383.2
  Top Layer w5: R5.1 118.26,1009.06 118.26,980.81 C2.2 144.76,980.81 169.68,980.81 180.31,991.44 180.31,1084.81 178.77,1084.81 ; C1.2@145.25,1084.81 178.77,1084.81 ; v1(191,1092) 185.96,1092 178.77,1084.81 ; v1(264.27,1108.73) 266.55,1111.02 266.55,1146.25 B1.29
  Bottom Layer w5: v1(191,1092) 193.58,1089.42 245.58,1089.42 264.58,1108.42 v1(264.27,1108.73)
NetC23_1: C23.1 U5.20 | length 117.8
  Top Layer w15: U5.20 599.67,940.14 599.67,922.09 632,889.75 632,842.56 C23.1
NetC24_1: C24.1 U5.14 | length 283.1
  Top Layer w10: C24.1@213.54,1034.1 224.37,1034.1 287.53,970.94 U5.14
NetC24_2: C24.2 R13.4 R15.1 | length 806.7
  Top Layer w10: C24.2@224.37,921.9 243.97,902.29 243.97,797.71 255,786.69 v1(255,783) 255,727.85 315.53,667.32 R13.4
  Bottom Layer w10: R15.1 112,551 104,559 104,684 203,783 v1(255,783)
NetC25_1: C25.1 U5.13 | length 184.4
  Top Layer w10: C25.1@304,1034.1 314.83,1034.1 358.3,990.63 U5.13
NetC25_2: C25.2 R13.3 R16.1 | length 623.5
  Top Layer w10: C25.2@293.17,921.9 C25.2@304,921.9 ; C25.2@314,908 282.24,876.24 282.24,721.83 314.94,689.13 v1(331.65,689.13) 333.78,687 R13.3
  Bottom Layer w10: R16.1 158.13,642.13 187,671 240,671 255.52,686.52 329.05,686.52 v1(331.65,689.13)
NetC26_1: C26.1 C27.1 R14.7 R14.8 | length 110.2
  Top Layer w10: C27.1 781.56,918 C26.1 ; C26.1@790.56,975 R14.8 R14.7
NetC26_2: C26.2 U5.23 | length 87.1
  Top Layer w10: U5.23 650.29,989.91 674.09,989.91 695,969 723.44,969 C26.2
NetC28_1: C28.1 U5.17 | length 112
  Top Layer w10: C28.1 510.97,842.56 521.72,853.31 521.72,876.72 540.31,895.31 U5.17
NetC28_2: C28.2 R13.1 R17.1 | length 227
  Top Layer w10: R13.1 458.09,726.37 459,727.28 459,747 467.57,755.57 496.63,755.57 ; C28.2 506.06,784.5 506.06,765 496.63,755.57 ; R17.1 567.94,680 547.24,680 536,691.24 536,734 514.43,755.57 496.63,755.57
NetC29_1: C29.1 U5.24 | length 79.8
  Top Layer w10: U5.24@650.29,1009.59 U5.24 721.76,1010.31 C29.1
NetC29_2: C29.2 C30.1 R14.5 R14.6 | length 164.6
  Top Layer w10: C29.2@790.25,1023.69 C29.2 806.44,1015 823.35,1031.91 C30.1@822.69,1032.56 ; C30.1 833,1041.56 870.09,1004.46 870.09,975.91 R14.6 R14.5
NetC31_1: C31.1 U5.16 | length 124.1
  Top Layer w10: C31.1 461.97,842.56 472.72,853.31 472.72,871.72 519.91,918.91 519.91,939.71 U5.16
NetC31_2: C31.2 R13.2 R18.1 | length 438.6
  Top Layer w10: R13.2 457.13,707.59 441.95,707.59 427,722.54 427,756.41 v1(431,760.41) 458.03,787.44 C31.2 ; R18.1 621.94,681 v1(670,681)
  Bottom Layer w10: v1(431,760.41) 590.59,760.41 v1(670,681)
NetC32_1: C32.1 R20.1 | length 75.4
  Top Layer w10: C32.1 515.75,593.25 546.75,593.25 566.03,573.97 R20.1
NetC32_2: C32.2 C33.1 M1.1 R21.2 | length 193.7
  Top Layer w10: M1.1 450.94,438.93 R21.2 450.94,543.82 C33.1 C32.2
NetL1_1: L1.1 R8.1 | length 61.8
  Top Layer w5: R8.1 157.94,2116.94 L1.1
NetL2_1: L2.1 R9.1 | length 92.9
  Top Layer w15: L2.1 855.56,2109.44 R9.1
NetL3_1: L3.1 R10.1 | length 70.2
  Top Layer w10: R10.1 L3.1
NetR12_1: R12.1 U5.25 | length 116.9
  Top Layer w5: U5.25 651.07,1028.5 686.5,1028.5 718.69,1060.69 718.69,1075.81 R12.1
NetR15_3: R15.3 R17.2 | length 316.9
  Top Layer w15: v1@524,642 525,641 v1(526,641) 528.33,641 536.14,633.19 559.75,633.19 R17.2
  Bottom Layer w15: R15.3 436,551 v1(526,641)
NetR16_3: R16.3 R18.2 | length 443.4
  Top Layer w15: R18.2 621.97,623.97 661.03,623.97 v1(662,623)
  Bottom Layer w15: R16.3 445,612 498.31,665.31 566.64,665.31 608.95,623 v1(662,623)
OSC_49.152M: B1.37 OSC_1.3@625.16,1352.39 | length 384.4
  Top Layer w5: B1.37 448.23,1174.73 457.96,1165 v1(463,1165) ; OSC_1.3@625,1353.78 626,1352.78 v1(626,1314)
  Bottom Layer w5: v1(463,1165) 435,1193 435,1243 479.14,1287.14 599.14,1287.14 v1(626,1314)
RESET_FPGA: B1.8 R4.1 U2.10 | length 623.6
  Top Layer w5: B1.8 266.74,1419.56 266.74,1449.43 275,1457.69 v1(275,1480) ; v1(515,1627) 537,1627 556,1608 U2.10 646.94,1608 667.72,1587.22 669.69,1587.22 682.94,1573.97 R4.1
  Bottom Layer w5: v1(275,1480) 275,1560.55 316.31,1601.86 316.31,1612.62 345.69,1642 500,1642 v1(515,1627)
RXD: B1.19 pad.4@407,1527 U2.8 | length 572.9
  Top Layer w5: v1(130.99,1272.78) 131.36,1273.16 B1.19 ; v1(346,1579) 348.36,1579 369.36,1558 U2.8
  Bottom Layer w5: v1(130.99,1272.78) 133.45,1272.78 298.69,1438.03 298.69,1461 304.31,1466.62 304.31,1492.38 299.69,1497 299.69,1548.55 327.69,1576.55 343.55,1576.55 v1(346,1579) 350.5,1579 402.5,1527 pad.4@407,1527
TXD: B1.18 pad.4@407,1600 U2.7 | length 601.9
  Top Layer w5: v1(110.21,1292.48) 110.39,1292.66 160.99,1292.66 B1.18 ; v1(339,1608) U2.7
  Bottom Layer w5: v1(110.21,1292.48) 139,1292.48 288.69,1442.17 288.69,1465.14 294.31,1470.76 294.31,1488.24 289.69,1492.86 289.69,1558.69 v1(339,1608) 342.56,1604.44 402.56,1604.44 pad.4@407,1600
USB_D_N: OSC_1.2@525.59,2023.69 U2.13 | length 328.8
  Top Layer w15: OSC_1.2@525.59,2023.69 525.59,1777.41 545,1758 U2.13
USB_D_P: OSC_1.3@500,2023.69 R7.2 U2.12 | length 478.7
  Top Layer w15: v1(452,1971) 499,1971 500,1970 ; OSC_1.3@500,2023.69 500,1970 ; U2.12 537,1708 500,1745 500,1970
  Bottom Layer w15: v1(452,1971) 453.5,1972.5 485.44,1972.5 R7.2
pads on no net: B1.6 B1.11 B1.27 J2.None J3.None OSC_1.4@474.41,2023.69 OSC_1.M1 OSC_1.M2 OSC_1.S1 OSC_1.S2 OSC_1.S3 OSC_1.S4 U2.6 U5.2 U5.6 U5.21

## Polygon pours and split planes (outlines as drawn)
GND on Bottom Layer "Bottom Layer-GND" (solid, remove dead copper, pour order 17): 998.44,1059.16 -1.56,1059.16 -1.56,2179 998.44,2179
AGND on Bottom Layer "Bottom Layer-AGND" (solid, remove dead copper, pour order 11): 1000,304 0,304 0,1028.63 1000,1028.63
AGND on Bottom Layer "Bottom Layer-AGND 1" (solid, remove dead copper, pour order 15): 497.61,1020.39 490,1028 490,1100 630,1100 630,1023.89
GND on Top Layer "Top Layer-GND" (solid, remove dead copper, pour order 19): 1000,1056 0,1056 0,2179 1000,2179
AGND on Top Layer "Top Layer-AGND" (solid, remove dead copper, pour order 13): 1000,305 0,305 0,1029.63 1000,1029.63

## Other copper
Top Layer:
  rectangle net 5V: 544,1960 560,2050
  region: 830.69,919.66
  region: 830.69,919.66

## Silkscreen, mask and mechanical layers (free items; w line width, h text height)
Top Overlay:
  region: 59,673 39,673 39,585 59,585
  rectangle: 939,555 959,643
  region: 949,638 921,638 949,666
  region: 949,638 977,638 949,666
  region: 49,590 21,590 49,562
  region: 49,590 77,590 49,562
  text "PRG" at 271,2158 h20 r270
  text "ON" at 713,2148 h20 r270
  text "3V3" at 22,2020 h20
  text "5V" at 933,2018 h20
  text "GND" at 22,1919.27 h20
  text "AGND" at 913.01,1917.74 h20
  text "IO0" at 23.67,1818.55 h20
  text "IO8" at 925,1819 h20
  text "IO1" at 27,1717.83 h20
  text "IO9" at 925,1718 h20
  text "IO2" at 24,1619 h20
  text "IO10" at 916,1619 h20
  text "IO3" at 24,1519 h20
  text "IO11" at 920,1518 h20
  text "IO4" at 24,1419 h20
  text "IO12" at 916,1419 h20
  text "IO13" at 916,1319 h20
  text "IO5" at 24,1318 h20
  text "IO6" at 24,1219 h20
  text "IO14" at 916,1219 h20
  text "IO15" at 916,1119 h20
  text "IO7" at 24,1118 h20
  text "O_L" at 22,1021 h20
  text "I_R" at 925,1021 h20
  text "O_R" at 22,921 h20
  text "I_L" at 925,921 h20
Bottom Overlay:
  drawing of 10 lines, arcs and shapes, not listed
  text "TxD" at 503.22,1589 h20
  text "RxD" at 504.36,1516 h20
  text "RocketFPGA" at 715.7,835 h60
  text "HP" at 170,499 h20
  text "Line" at 331.62,499 h20

## Text inside footprints (layer, text, board x,y; h text height)
OSC_1: Mechanical 1 "PCB Edge" at 555.12,2211.68 h30 r180